# EAGLE board DIGISPARK_PRODUCTION_REV3 (copia) (EAGLE 8.3.1)

Size 9.83 x 16.5 mm. Coordinates in mm from the lower left corner, seen from the top.
Outline: 0,0 9.83,0 9.83,16.5 0,16.5 0,0
Copper layers (1*16): Top 0.035mm / dielectric 1.5mm / Bottom 0.035mm
Design rules "default": minimum track width 6mil, minimum drill 0.35mm, track to track 6mil, track to pad 6mil, pad to pad 6mil, via to via 6mil, smd to smd 6mil, copper to edge 40mil, drill to drill 6mil, minimum pad ring 10mil, minimum via ring 8mil, stop-mask expansion 4mil, vias tented up to drill 0mil, thermal gap 10mil

## Footprints (pad centres in the part's own frame; a part is rotated, then mirrored left to right if it is on the bottom)
SOD-323 = smd 0.63 x 0.83: 1 -1.15,0; 2 1.15,0
SO08-EIAJ = smd 0.61 x 2.21: 1 -1.905,-3.378; 2 -0.635,-3.378; 3 0.635,-3.378; 4 1.905,-3.378; 5 1.905,3.353; 6 0.635,3.353; 7 -0.635,3.353; 8 -1.905,3.353
1X04 = drill 1.016 long: 1 -3.81,0; 2 -1.27,0; 3 1.27,0; 4 3.81,0
0402-RES = smd 0.7 x 0.9: 1 -0.65,0; 2 0.65,0

## Placement (x,y rotation side)
D1  3.6 Zener  [SOD-323]  7.62,7.62 180 bottom
D2  3.6 Zener  [SOD-323]  7.62,5.08 180 bottom
IC1  ATTINY85  [SO08-EIAJ]  5.08,11.43 0 top
JP1  [1X04]  5.08,1.27 0 top
R1  68R  [0402-RES]  3.81,5.08 270 top
R2  68R  [0402-RES]  6.35,5.08 270 top
R3  1K5  [0402-RES]  1.27,5.08 90 bottom

## Library data of the parts
D1 D2 IC1 R1-R3 = SparkFun
JP1 = pinhead

## Nets
5V: IC1.8 JP1.1 R3.1
D+: D2.1 JP1.3 R2.2
D-: D1.1 JP1.2 R1.2 R3.2
GND: D1.2 D2.2 IC1.4 JP1.4
N$2: IC1.2 R1.1
N$4: IC1.3 R2.1

## Tracks (layer width: path | path; a pad name or v marks a point on that pad's centre or on a via)
5V  (2 unrouted)
D+  (2 unrouted)
D-  (3 unrouted)
GND  (3 unrouted)
N$2  (1 unrouted)
N$4  (1 unrouted)